# Altium PCB Effect_PCB.PcbDoc
Units mm, origin at the board's own origin, x right, y up, seen from the top; angles counter-clockwise.
Board outline 76.5 x 53.5 mm, 4 copper layers (Top Layer, Middle Layer 1, Middle Layer 2, Bottom Layer), stack 1.641 mm thick; 86 components, 53 nets, 326 pads, 231 vias.
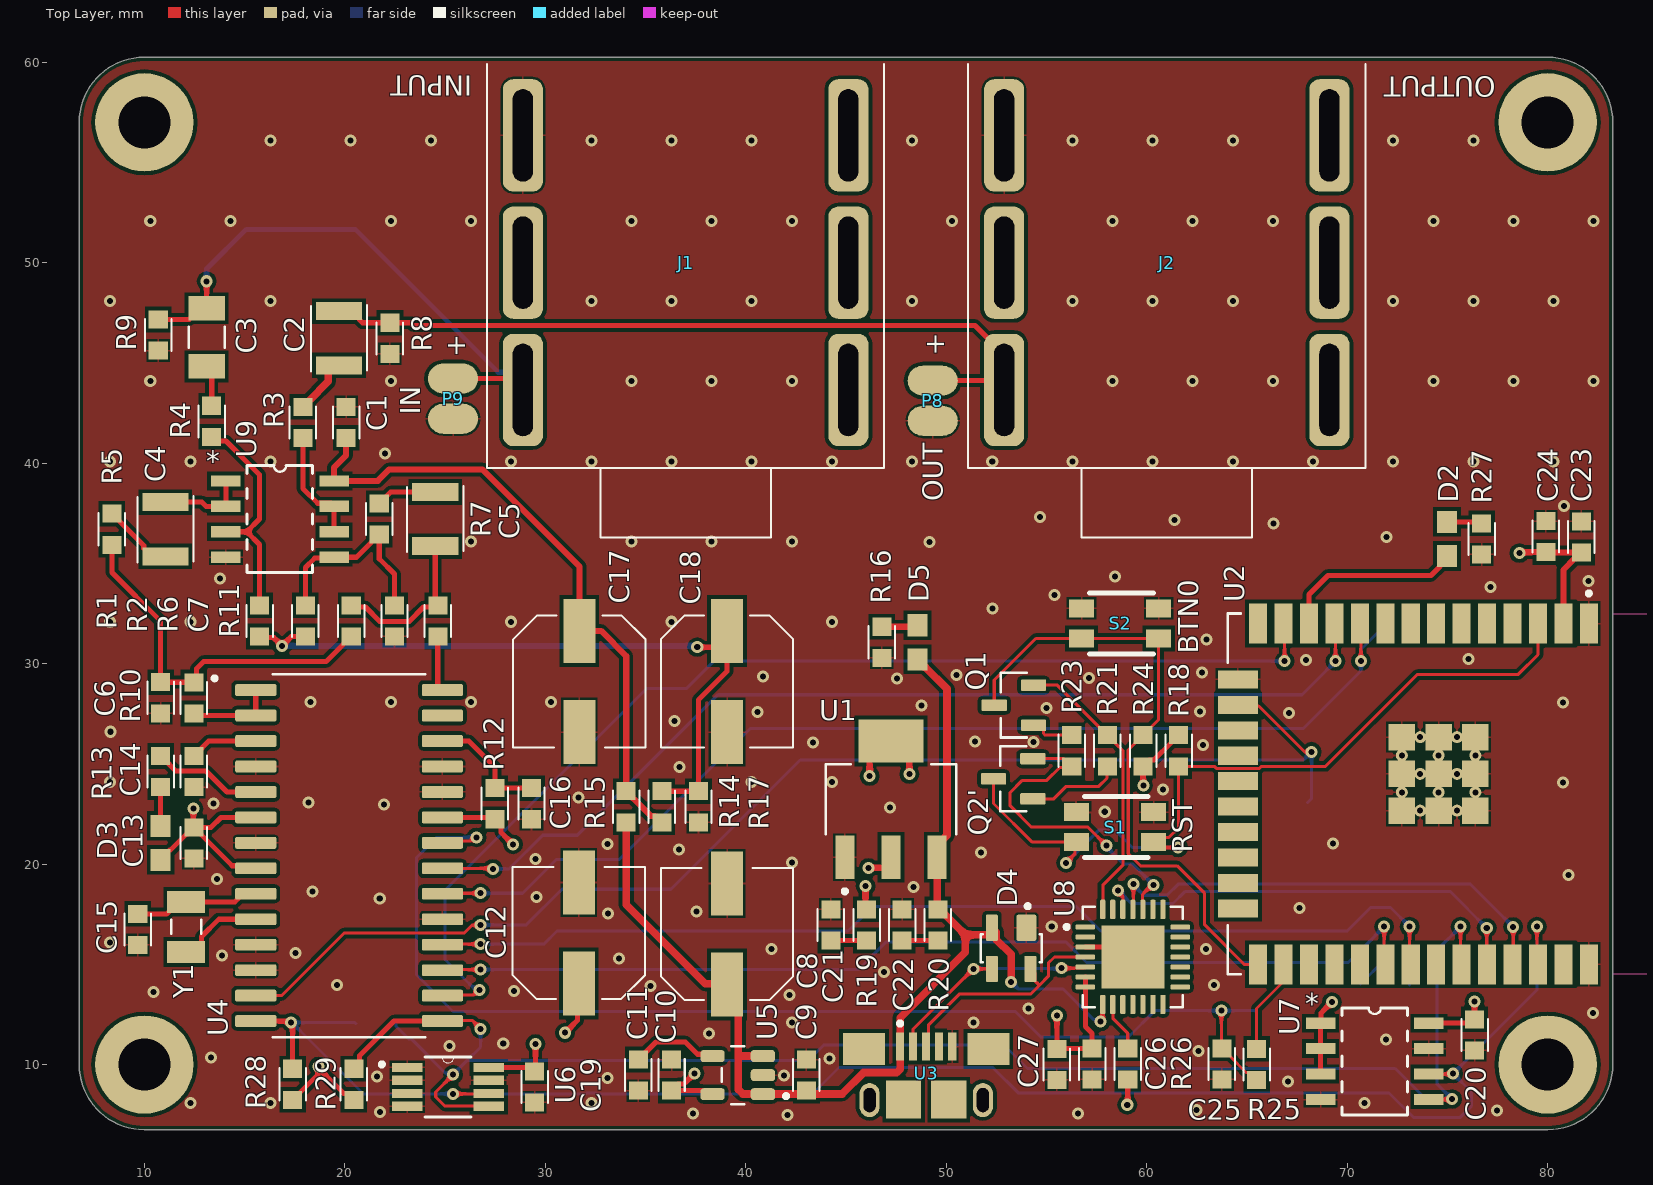
[diagram p0: Top Layer view]
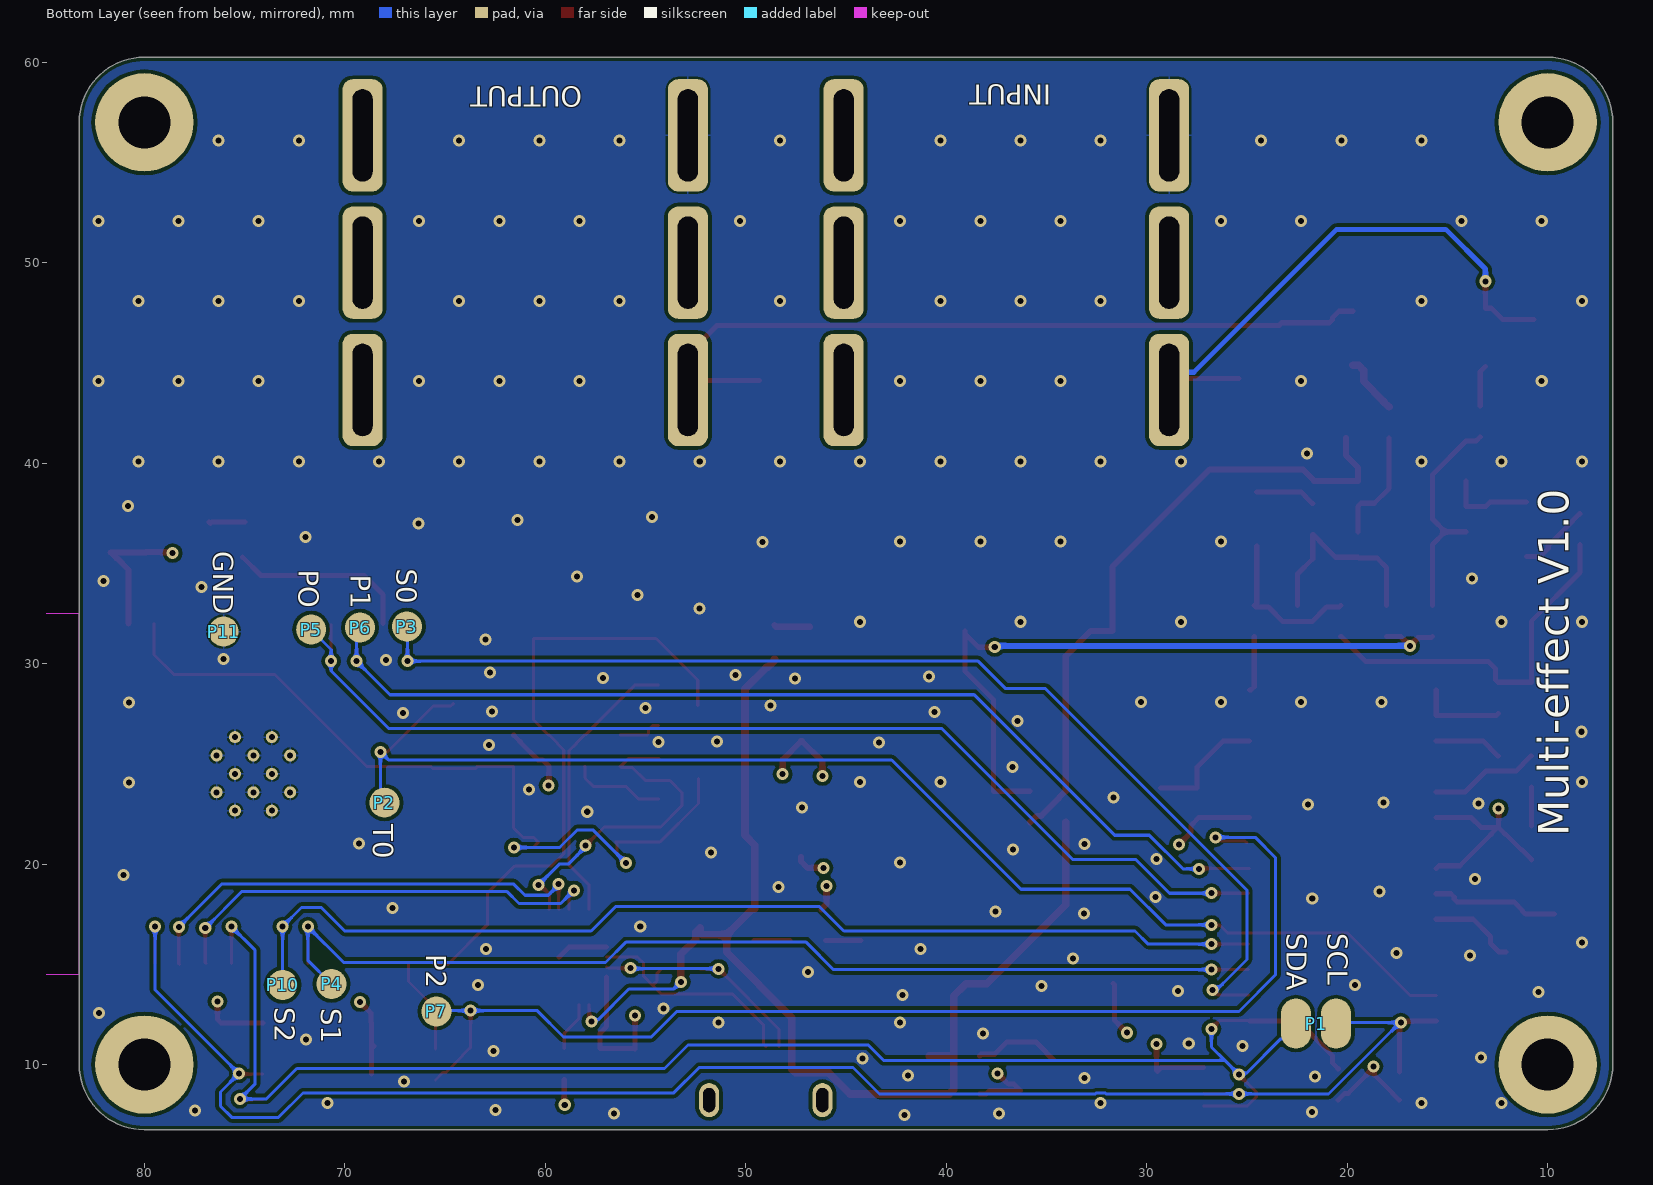
[diagram p1: Bottom Layer view, seen from below]
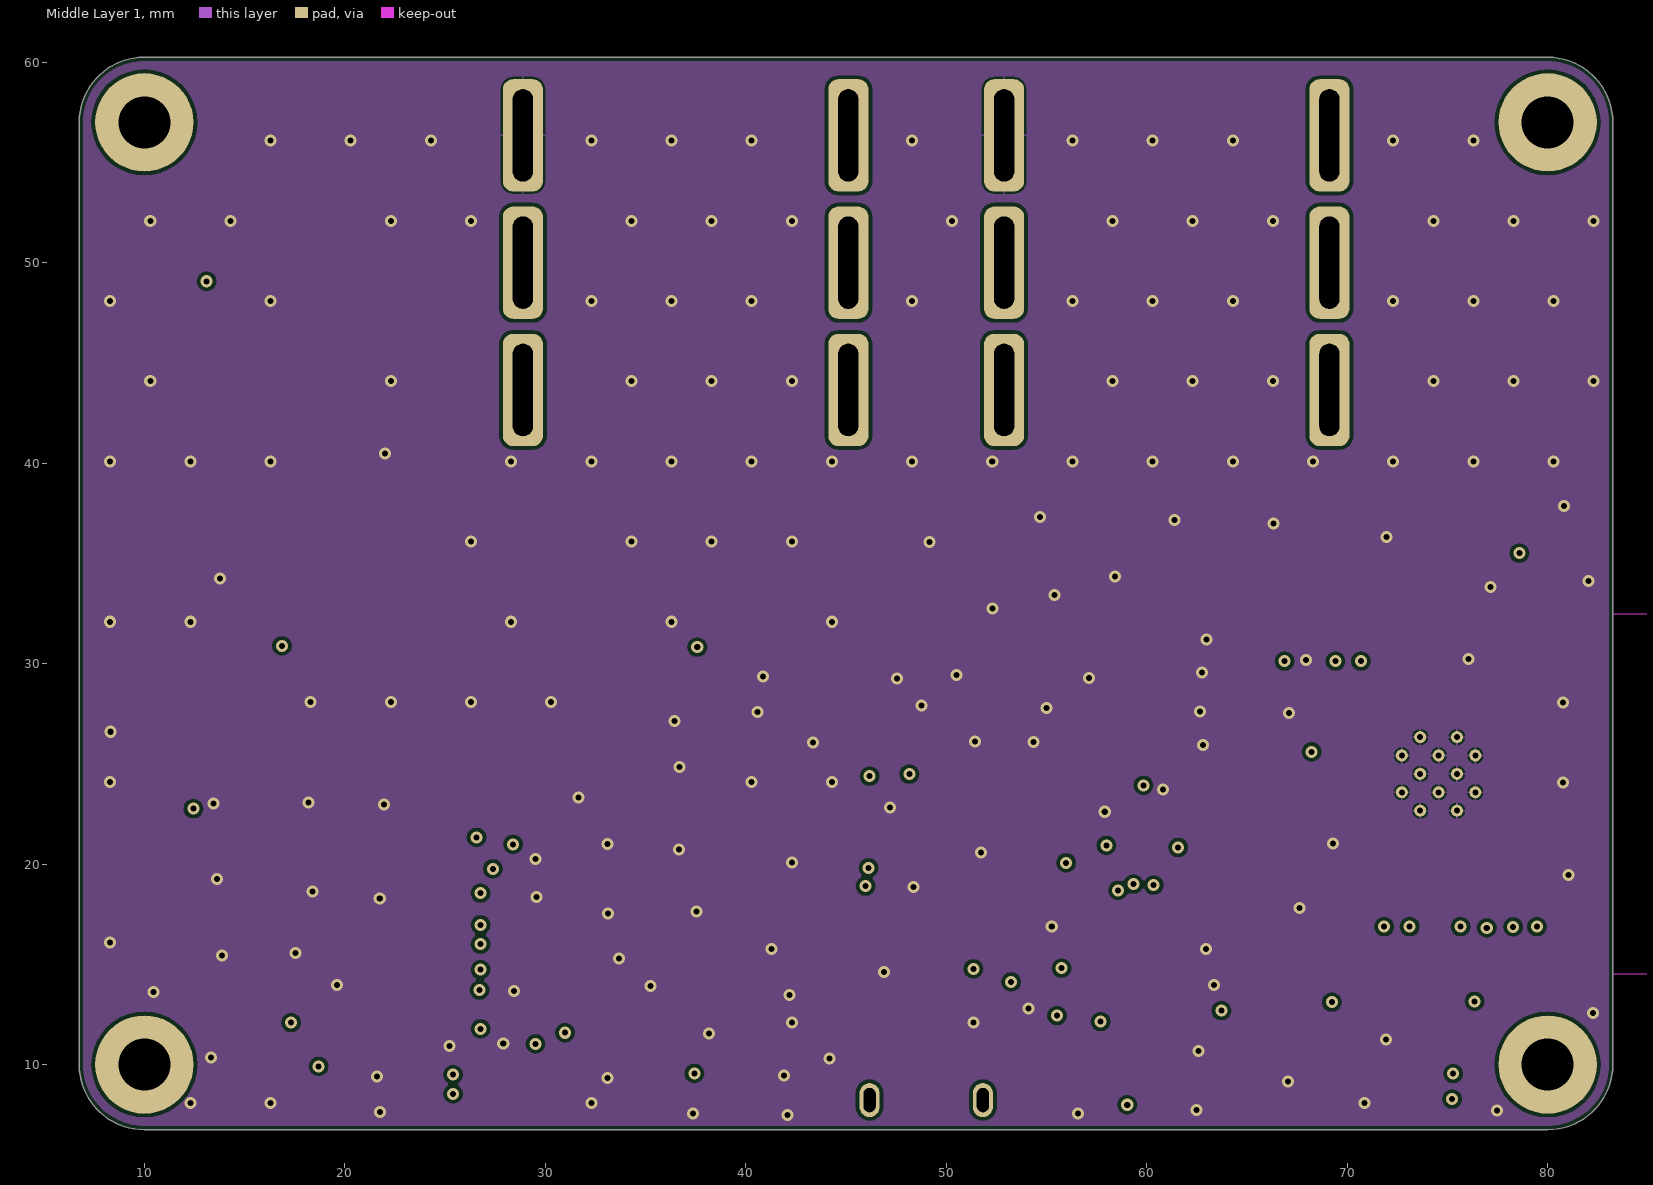
[diagram p2: Middle Layer 1]
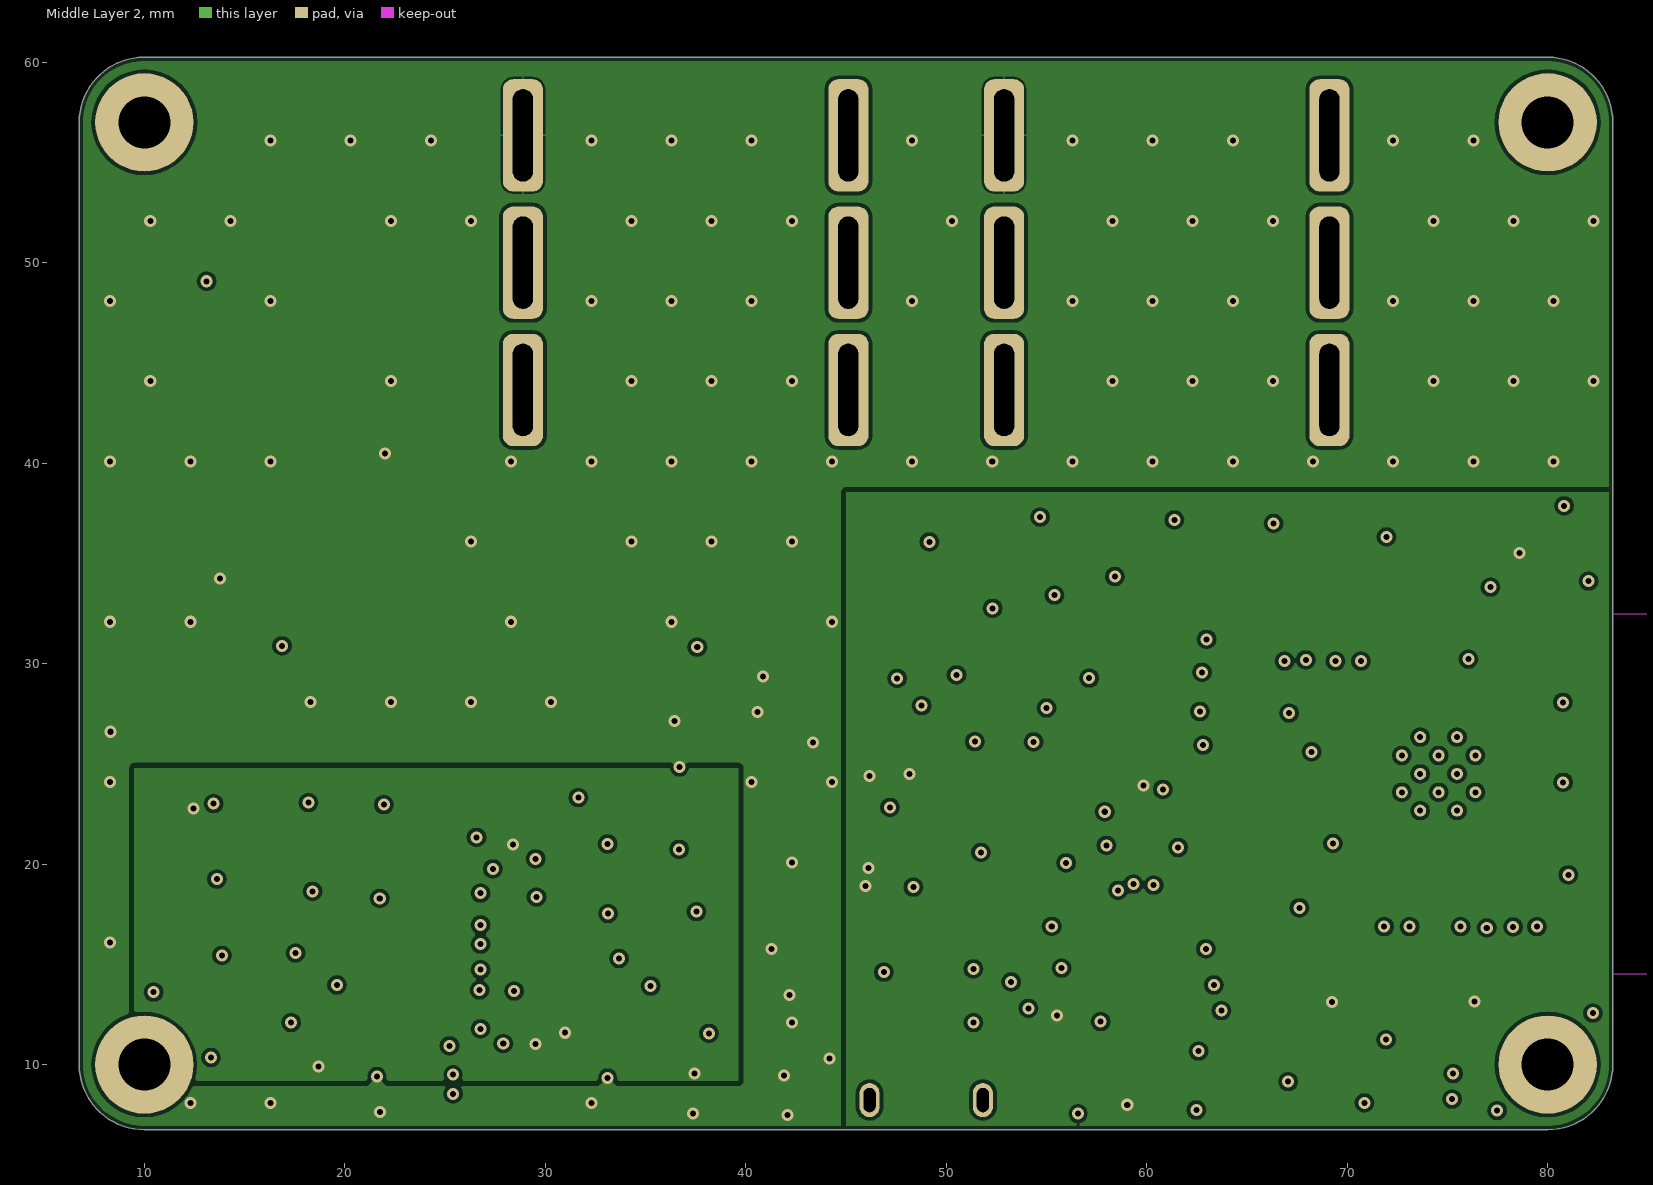
[diagram p3: Middle Layer 2]
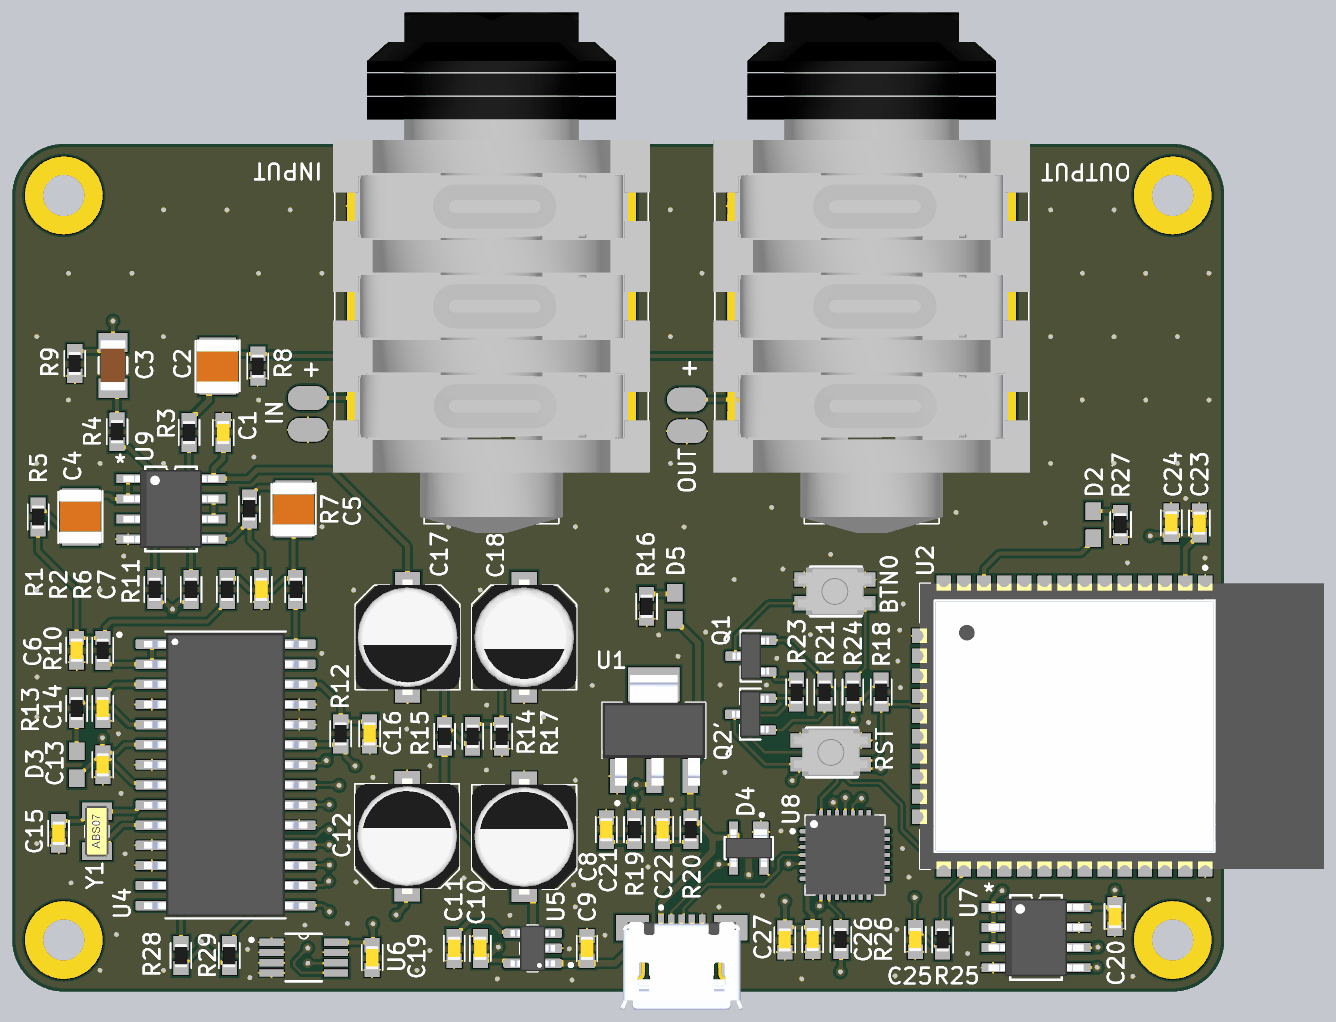
[diagram p4: 3D render of the assembled board from above, using the file's embedded part models]

## Layer stack, top to bottom
Top Solder: solder mask 0.0102, Solder Resist, Dk 3.5
Top Layer: signal copper 0.0356
Dielectric 2: dielectric 0.1702, FR-4, Dk 4.5
Middle Layer 1: signal copper 0.0178
Dielectric 1: dielectric 1.1938, FR-4, Dk 4.8
Middle Layer 2: signal copper 0.0178
Dielectric 3: dielectric 0.1702, FR-4, Dk 4.5
Bottom Layer: signal copper 0.0356
Bottom Solder: solder mask 0.0102, Solder Resist, Dk 3.5

## Board outline
6.75,10 6.75,57 cw(c10,57) 10,60.25 80,60.25 cw(c80,57) 83.25,57 83.25,10 cw(c80,10) 80,6.75 10,6.75 cw(c10,10)

## Design rules (kind name [scope] priority, off if disabled: settings)
BoardOutlineClearance [All] p1: gap=0.2 ignorepadtopadclearanceinfootprint=FALSE
Clearance [All] p1: gap=0.102 ignorepadtopadclearanceinfootprint=FALSE except(0.127: Arc-Via Track-Via SMDPad-Via THPad-Via Via-Via Via-Fill Via-Region Via-Text; 0.178: Arc-Poly Track-Poly SMDPad-Poly THPad-Poly Via-Poly Fill-Poly; 0.25: Arc-Hole Track-Hole SMDPad-Hole THPad-Hole Via-Hole Fill-Hole Poly-Hole Region-Hole Text-Hole; 0.254: Poly-Poly)
ComponentClearance [All] p1: gap=0.102 collisioncheckmode=3 verticalgap=0.102 showdistances=TRUE
DiffPairsRouting [All] p1: maxlimit=0.102 minlimit=0.102 mostfreqgap=0.102 toplayer_minwidth=0.102 toplayer_maxwidth=1816.048 toplayer_prefwidth=0.102 midlayer1_minwidth=0.102 midlayer1_maxwidth=1816.048 midlayer1_prefwidth=0.102 midlayer2_minwidth=0.102 midlayer2_maxwidth=1816.048 midlayer2_prefwidth=0.102 bottomlayer_minwidth=0.102 bottomlayer_maxwidth=1816.048 bottomlayer_prefwidth=0.102 maxuncoupledlength=12.7
Height [All] p1: minheight=0 maxheight=1816.048 prefheight=12.7
HoleSize [All] p1: absolutevalues=TRUE maxlimit=6.3 minlimit=0.2 maxpercent=80.000 minpercent=20.000
HoleToHoleClearance [All] p1: gap=0.25 allowstackedmicrovias=FALSE
MinimumAnnularRing [All] p1: minimumring=0.076
MinimumSolderMaskSliver [All] p1: minsoldermaskwidth=0
PlaneClearance [All] p1: clearance=0.152
PlaneConnect PlaneConnectPowerPads [InPadClass('PowerPads')] p1: planeconnectstyle=Direct reliefexpansion=0.508 reliefentries=4 reliefconductorwidth=0.254 reliefairgap=0.254
PlaneConnect [All] p2: pad.planeconnectstyle=Relief pad.reliefexpansion=0.3 pad.reliefentries=4 pad.reliefconductorwidth=0.102 pad.reliefairgap=0.102 via.planeconnectstyle=Direct via.reliefexpansion=0.3 via.reliefentries=4 via.reliefconductorwidth=0.127 via.reliefairgap=0.127
PolygonConnect PolygonConnectPowerPads [All vs (InPadClass('PowerPads'))] p1: connectstyle=Direct reliefconductorwidth=0.254 reliefentries=4 polygonreliefangle="90 Angle" airgapwidth=0.254
PolygonConnect [All] p2: thpad.connectstyle=Relief thpad.reliefconductorwidth=0.102 thpad.reliefentries=4 thpad.polygonreliefangle="90 Angle" thpad.airgapwidth=0.102 smdpad.connectstyle=Relief smdpad.reliefconductorwidth=0.102 smdpad.reliefentries=4 smdpad.polygonreliefangle="90 Angle" smdpad.airgapwidth=0.102 via.connectstyle=Direct via.reliefconductorwidth=0.127 via.reliefentries=4 via.polygonreliefangle="90 Angle" via.airgapwidth=0.127
RoutingVias [All] p1: holewidth=0.2 width=0.45 viastyle="Through Hole" minholewidth=0.2 minwidth=0.45 maxholewidth=6.3 maxwidth=6.55
SilkToSilkClearance [All] p1: silktosilkclearance=0
SilkToSolderMaskClearance [IsPad] p1: minsilkscreentomaskgap=0.102 clearancetoexposedcopper=TRUE
SolderMaskExpansion [All] p1: expansion=0.075 istentingtop=FALSE
Width [All] p1: maxlimit=1816.048 minlimit=0.102 preferedwidth=0.102
20 further rules are at their usual default settings.

## Classes and differential pairs
component class FV-1: C1 C2 C3 C4 C5 C6 C7 C8 C9 C10 C11 C12 C13 C14 C15 C16 C17 C18 C19 C20 D3 D5 J1 J2 P1 P8 P9 R1 R2 R3 R4 R5 R6 R7 R8 R9 R10 R11 R12 R13 R14 R15 R16 R17 R28 R29 U U4 U5 U6 U7 U9 Y1
component class ESP32: C21 C22 C23 C24 C25 C26 C27 D2 D4 P2 P3 P4 P5 P6 P7 P10 P11 Q1 Q2' R18 R19 R20 R21 R23 R24 R25 R26 R27 S1 S2 U1 U2 U3 U8

## Components (designator, comment, footprint, x,y, rotation, side; value= is the part's Value field where it differs from the comment)
C1 "0.1uF" CHIP_0603 20.066,42.037 r90 top
C2 "1u" CHIP_1210 19.71,46.228 r270 top
C3 "100n" CAPC3216X180N 13.106,46.279 r90 top
C4 "1u" CHIP_1210 11.049,36.703 r90 top
C5 "1u" CHIP_1210 24.511,37.211 r270 top
C6 "2n2" CHIP_0603 10.815,28.298 r270 top
C7 "2n2" CHIP_0603 22.479,32.131 r270 top
C8 "100u" UCD1E101MCL1GS 39.065,16.51 r90 top
C9 "1u" CHIP_0603 43.028,9.474 r90 top
C10 "1u" CHIP_0603 36.297,9.474 r90 top
C11 "DNP" CHIP_0603 34.646,9.474 r90 top
C12 "100u" UCD1E101MCL1GS 31.674,16.561 r90 top
C13 "1u" CHIP_0603 12.466,21.059 r270 top
C14 "1u" CHIP_0603 12.466,24.615 r270 top
C15 "15p" CHIP_0603 9.672,16.741 r270 top
C16 "1u" CHIP_0603 29.312,23.012 r270 top
C17 "100u" UCD1E101MCL1GS 31.699,29.108 r270 top
C18 "47u" EEE1EA470WAP 39.065,29.108 r270 top
C19 "0.1uF" CHIP_0603 29.464,8.89 r270 top
C20 "0.1uF" CHIP_0603 76.352,11.481 r270 top
C21 "22uF" CHIP_0603 44.247,16.967 r90 top
C22 "22uF" CHIP_0603 47.803,16.967 r90 top
C23 "0.1uF" CHIP_0603 81.686,36.322 r90 top
C24 "22uF" CHIP_0603 79.908,36.335 r90 top
C25 "22uF" CHIP_0603 63.754,10.033 r270 top
C26 "0.1uF" CHIP_0603 57.277,10.033 r270 top
C27 "4.7Uf" CHIP_0603 55.519,10.01 r270 top
D2 "Blue LED" "0603 LED Generic" 74.981,36.22 r270 top
D3 "Clip LED" "0603 LED Generic" 10.815,21.059 r270 top
D4 "SP0503BAHTG" SP0503BAHTG 53.238,15.799 r180 top
D5 "Red LED" "0603 LED Generic" 48.565,31.064 r270 top
J1 "Input" ACJS-IHS 37,50 r90 top
J2 "Output" ACJS-IHS 61,50 r90 top
P1 "I2C Test Point" "2 Test Points" 21.539,12.04 r270 bottom
P2 "Test Point" "1 Solder Pad" 68.021,23.063 r180 bottom
P3 "Test Point" "1 Solder Pad" 66.904,31.852 r180 bottom
P4 "Test Point" "1 Solder Pad" 70.663,14.021 r180 bottom
P5 "Test Point" "1 Solder Pad" 71.679,31.699 r180 bottom
P6 "Test Point" "1 Solder Pad" 69.24,31.801 r180 bottom
P7 "Test Point" "1 Solder Pad" 65.43,12.649 r180 bottom
P8 "Double Test Point" "2 Test Points" 49.327,43.129 r0 top
P9 "Double Test Point" "2 Test Points" 25.4,43.231 r0 top
P10 "Test Point" "1 Solder Pad" 73.101,13.97 r90 bottom
P11 "Test Point" "1 Solder Pad" 76.048,31.598 r180 bottom
Q1 "SS8050-G" SS8050-G 53.376,27.924 r270 top
Q2' "SS8050-G" SS8050-G 53.34,24.257 r270 top
R1 "1M" CHIP_R_0603 15.748,32.131 r90 top
R2 "100K" CHIP_R_0603 18.034,32.131 r90 top
R3 "100R" CHIP_R_0603 17.907,42.037 r90 top
R4 "1K" CHIP_R_0603 13.36,42.088 r270 top
R5 "1K" CHIP_R_0603 8.382,36.703 r270 top
R6 "DNP" CHIP_R_0603 20.32,32.131 r90 top
R7 "1K" CHIP_R_0603 21.717,37.211 r270 top
R8 "100K" CHIP_R_0603 22.25,46.228 r270 top
R9 "1M" CHIP_R_0603 10.693,46.393 r270 top
R10 "0R" CHIP_R_0603 12.466,28.285 r270 top
R11 "0R" CHIP_R_0603 24.638,32.131 r90 top
R12 "100R" CHIP_R_0603 27.483,23.012 r270 top
R13 "100R" CHIP_R_0603 10.815,24.615 r90 top
R14 "47R" CHIP_R_0603 34.036,22.86 r270 top
R15 "10K" CHIP_R_0603 35.814,22.86 r270 top
R16 "1K" CHIP_R_0603 46.787,31.064 r90 top
R17 "10K" CHIP_R_0603 37.643,22.86 r270 top
R18 "10K" CHIP_R_0603 61.595,25.654 r270 top
R19 "1R" CHIP_R_0603 46.025,16.967 r270 top
R20 "1R" CHIP_R_0603 49.581,16.967 r270 top
R21 "10K" CHIP_R_0603 58.039,25.654 r90 top
R23 "10K" CHIP_R_0603 56.261,25.654 r270 top
R24 "10K" CHIP_R_0603 59.817,25.654 r90 top
R25 "2K" CHIP_R_0603 65.481,10.008 r270 top
R26 "2K" CHIP_R_0603 59.055,10.033 r270 top
R27 "1K" CHIP_R_0603 76.708,36.22 r270 top
R28 "DNP" CHIP_R_0603 17.399,9.017 r90 top
R29 "DNP" CHIP_R_0603 20.447,9.017 r90 top
S1 "TS-1185EC-C-D-B" TS-1185EC-C-D-B 58.42,21.844 r180 top
S2 "TS-1185EC-C-D-B" TS-1185EC-C-D-B 58.674,32.004 r180 top
U1 "LMS8117AMP-3.3/NOPB" SOT230P700X180-4N 47.244,23.241 r90 top
U2 "ESP32-WROOM-32E_(16MB)" MODULE_ESP32-WROOM-32E 76.8,23.5 r270 top
U3 "Micro_USB" U254-051T-4BH83-F1S 49,10.9 r0 top
U4 "SPN1001" SOIC-28 20.213,20.424 r0 top
U5 "LD39015M33R" SOT-23 39.599,9.474 r180 top
U6 "24LC32AT-I/MS" 24LC32AT-I/MS 25.146,8.89 r0 top
U7 "24LC512-I/SN" 24LC512-I/SN 71.374,10.16 r0 top
U8 "CP2102-GM" QFN50P500X500X100-29N 59.309,15.367 r0 top
U9 "TL072IDT" TL072BIDT 16.764,37.211 r0 top
Y1 "32.768kHz" XTAL_ABS07-32.768KHZ-T 12.085,16.868 r90 top

## Footprints (in the part's own frame and the unit in brackets; to place one, negate y for a bottom-side part, rotate by r counter-clockwise, add the part's x,y. Pads: shape width x height; smd on the part's side, far side on the other; paste and mask are expansions set on the pad)
"1 Solder Pad" [mm]
  round 1.5 smd: 1(0,0)
"2 Test Points" [mm]
  oval 2.5x1.5 smd: 1(0,0.984) 2(0,-1.016)
24LC32AT-I/MS [mil]
  rect 60x18 smd: 1(-80,38) 2(-80,13) 3(-80,-13) 4(-80,-38) 5(80,-38) 6(80,-13) 7(80,13) 8(80,38)
  silkscreen extent -134,-59 45,59, body extent -96,-59 96,59, height 45
24LC512-I/SN [mil]
  rect 58x22 smd: 1(-106.3,75) 2(-106.3,25) 3(-106.3,-25) 4(-106.3,-75) 5(106.3,-75) 6(106.3,-25) 7(106.3,25) 8(106.3,75)
  silkscreen extent -64,-105 64,105, body extent -118,-96 118,96, height 69
"0603 LED Generic" [mm]
  rect 1.1x1 smd: 1(-0.85,0) 2(0.85,0)
  body extent -0.8,-0.4 0.8,0.4, height 0.4
ACJS-IHS [mm]
  rrect50% 5.6x2 hole 1 slot 4.6 at 0 deg: R(0,8.115) RN(0,-8.115) S(6.35,8.115) SN(6.35,-8.115) T(-6.35,8.115) TN(-6.35,-8.115)
  silkscreen extent -13.72,-9.91 9.91,9.91, body extent -14.3,-10 18.55,10, height 16.05
CAPC3216X180N [mm]
  rect 1.21x1.82 smd: 1(-1.45,0) 2(1.45,0)
  silkscreen extent -0.52,-0.9 0.52,0.9, body extent -1.6,-0.8 1.6,0.8, height 1.8
CHIP_0603 [mm] "Chip Capacitor, 2-Leads, Body 1.60x0.80mm, IPC Medium Density"
  rect 0.9x0.95 smd: 1(-0.775,0) 2(0.775,0)
  silkscreen extent -0.8,-0.66 0.8,0.66, body extent -0.75,-0.4 0.75,0.4, height 0.65
CHIP_1210 [mm] "Chip Capacitor, 2-Leads, Body 3.20x2.50mm, IPC Medium Density"
  rect 0.9x2.3 smd: 1(-1.35,0) 2(1.35,0)
  silkscreen extent -1.65,-1.4 1.65,1.4, body extent -1.68,-1.35 1.73,1.35, height 1
CHIP_R_0603 [mm] "Chip Resistor, 2-Leads, Body 1.60x0.80mm, IPC Medium Density"
  rect 0.9x0.95 smd: 1(-0.775,0) 2(0.775,0)
  silkscreen extent -0.8,-0.66 0.8,0.66, body extent -0.75,-0.4 0.75,0.4, height 0.63
EEE1EA470WAP [mm] "Aluminum Electrolytic Capacitor, Body 6.60x6.60x5.40mm, IPC Low Density"
  rect 3.2x1.6 smd: +(-2.521,0) -(2.521,0)
  silkscreen extent -3.3,-3.3 3.3,3.3, body extent -3.65,-3.3 3.65,3.3, height 5.8
MODULE_ESP32-WROOM-32E [mm]
  rect 2x0.9 smd: 1(-8.5,5.26) 2(-8.5,3.99) 3(-8.5,2.72) 4(-8.5,1.45) 5(-8.5,0.18) 6(-8.5,-1.09) 7(-8.5,-2.36) 8(-8.5,-3.63) 9(-8.5,-4.9) 10(-8.5,-6.17) 11(-8.5,-7.44) 12(-8.5,-8.71) 13(-8.5,-9.98) 14(-8.5,-11.25) 25(8.5,-11.25) 26(8.5,-9.98) 27(8.5,-8.71) 28(8.5,-7.44) 29(8.5,-6.17) 30(8.5,-4.9) 31(8.5,-3.63) 32(8.5,-2.36) 33(8.5,-1.09) 34(8.5,0.18) 35(8.5,1.45) 36(8.5,2.72) 37(8.5,3.99) 38(8.5,5.26)
  rect 0.9x2 smd: 15(-5.715,-12.25) 16(-4.445,-12.25) 17(-3.175,-12.25) 18(-1.905,-12.25) 19(-0.635,-12.25) 20(0.635,-12.25) 21(1.905,-12.25) 22(3.175,-12.25) 23(4.445,-12.25) 24(5.715,-12.25)
  rect 1.33x1.33 smd: 39(-2.835,-0.405) 39(-2.835,-2.24) 39(-2.835,-4.075) 39(-1,-0.405) 39(-1,-2.24) 39(-1,-4.075) 39(0.835,-0.405) 39(0.835,-2.24) 39(0.835,-4.075)
  round 0.6 hole 0.3: 39(-2.835,-1.322) 39(-2.835,-3.157) 39(-1.917,-0.405) 39(-1.917,-2.24) 39(-1.917,-4.075) 39(-1,-1.322) 39(-1,-3.157) 39(-0.082,-0.405) 39(-0.082,-2.24) 39(-0.082,-4.075) 39(0.835,-1.322) 39(0.835,-3.157)
  Keep-Out Layer region: 9,6.45 -9,6.45 -9,12.75 9,12.75
  Keep-Out Layer region: 9,6.45 -9,6.45 -9,12.75 9,12.75
  silkscreen extent -10.1,-12.75 9,5.35, body extent -9,-12.75 9,12.75, height 3.2
QFN50P500X500X100-29N [mm]
  rrect50% 0.97x0.26 smd: 1(-2.37,1.5) 2(-2.37,1) 3(-2.37,0.5) 4(-2.37,0) 5(-2.37,-0.5) 6(-2.37,-1) 7(-2.37,-1.5) 15(2.37,-1.5) 16(2.37,-1) 17(2.37,-0.5) 18(2.37,0) 19(2.37,0.5) 20(2.37,1) 21(2.37,1.5)
  rrect50% 0.26x0.97 smd: 8(-1.5,-2.37) 9(-1,-2.37) 10(-0.5,-2.37) 11(0,-2.37) 12(0.5,-2.37) 13(1,-2.37) 14(1.5,-2.37) 22(1.5,2.37) 23(1,2.37) 24(0.5,2.37) 25(0,2.37) 26(-0.5,2.37) 27(-1,2.37) 28(-1.5,2.37)
  rect 3.15x3.15 smd: 29(0,0)
  silkscreen extent -3.4,-2.5 2.5,2.5, body extent -2.5,-2.5 2.5,2.5, height 1
SOIC-28 [mm]
  rrect25% 2.05x0.59 smd: 1(-4.655,8.255) 2(-4.655,6.985) 3(-4.655,5.715) 4(-4.655,4.445) 5(-4.655,3.175) 6(-4.655,1.905) 7(-4.655,0.635) 8(-4.655,-0.635) 9(-4.655,-1.905) 10(-4.655,-3.175) 11(-4.655,-4.445) 12(-4.655,-5.715) 13(-4.655,-6.985) 14(-4.655,-8.255) 15(4.655,-8.255) 16(4.655,-6.985) 17(4.655,-5.715) 18(4.655,-4.445) 19(4.655,-3.175) 20(4.655,-1.905) 21(4.655,-0.635) 22(4.655,0.635) 23(4.655,1.905) 24(4.655,3.175) 25(4.655,4.445) 26(4.655,5.715) 27(4.655,6.985) 28(4.655,8.255)
  silkscreen extent -6.8,-9.05 3.8,9.05, body extent -5.16,-8.95 5.16,8.95, height 2.65
SOT230P700X180-4N [mm]
  rect 2.15x0.95 smd: 1(-2.9,2.3) 2(-2.9,0) 3(-2.9,-2.3)
  rect 2.15x3.25 smd: 4(2.9,0)
  silkscreen extent -4.7,-3.25 1.75,3.25, body extent -3.5,-3.25 3.5,3.25, height 1.8
SOT-23 [mm]
  rrect50% 1.21x0.59 smd: 1(-1.255,0.95) 2(-1.255,0) 3(-1.255,-0.95) 4(1.255,-0.95) 5(1.255,0.95)
  silkscreen extent -2.51,-1.45 0.8,1.45, body extent -1.4,-1.45 1.4,1.45, height 1.45
SP0503BAHTG [mm]
  rrect15% 0.99x1.3 smd: 1(-0.76,-1.025)
  rrect15% 0.59x1.3 smd: 2(0.96,-1.025) 3(0.96,1.025) 4(-0.96,1.025)
  silkscreen extent -1.52,-2.2 1.52,0.7, body extent -1.46,-1.18 1.46,1.19, height 1.22
SS8050-G [mm]
  rrect25% 0.59x1.26 smd: 1(1,0.98) 2(-1,0.98) 3(0,-0.98)
  silkscreen extent -1.61,-0.65 1.61,0.65, body extent -1.45,-1.15 1.45,1.15, height 1.1
TL072BIDT [mil]
  rect 58x22 smd: 1(-106.3,75) 2(-106.3,25) 3(-106.3,-25) 4(-106.3,-75) 5(106.3,-75) 6(106.3,-25) 7(106.3,25) 8(106.3,75)
  silkscreen extent -64,-105 64,105, body extent -118,-96 118,96, height 69
TS-1185EC-C-D-B [mm]
  rect 1.25x0.9 smd: 1(-1.925,0.75) 2(1.925,0.75) 3(1.925,-0.75) 4(-1.925,-0.75)
  silkscreen extent -1.65,-1.52 1.52,1.52, body extent -2.33,-1.5 2.33,1.5, height 2
U254-051T-4BH83-F1S [mm]
  rect 0.4x1.4 smd: 1(-1.3,0) 2(-0.65,0) 3(0,0) 4(0.65,0) 5(1.3,0)
  rect 2.1x1.6 smd: S1(-3.1,-0.125) S2(3.1,-0.125)
  rect 1.75x1.9 smd: S3(-1.125,-2.65) S4(1.125,-2.65)
  oval 1x1.7 hole 0.6 slot 1.2 at 90 deg: S5(-2.825,-2.67) S6(2.825,-2.67)
  silkscreen extent -1.4,1.05 -1.2,1.25, body extent -3.9,-5.31 3.9,0.24, height 2.7
UCD1E101MCL1GS [mm] "Aluminum Electrolytic Capacitor, Body 6.60x6.60x5.40mm, IPC Low Density"
  rect 3.2x1.6 smd: +(-2.521,0) -(2.521,0)
  silkscreen extent -3.3,-3.3 3.3,3.3, body extent -3.65,-3.3 3.65,3.3, height 7.7
XTAL_ABS07-32.768KHZ-T [mm]
  rect 1.1x1.9 smd: 1(-1.25,0) 2(1.25,0)
  silkscreen extent -0.35,-0.75 0.35,0.75, body extent -1.6,-0.75 1.6,0.75, height 0.89

## Part data
C1 C9 C10 C11 C13 C14 C15 C16 C19 C20 C21 C22 C23 C24 C25 C26 C27: library part "0603 Ceramic Capacitor", "Generic 0603 Ceramic Capacitor", Package="1005 Yageo", DigiKey-Purchase-URL=https://snapeda.com/shop?store=DigiKey&id=940461, MF=Yageo, Mouser-Purchase-URL=https://snapeda.com/shop?store=Mouser&id=940461, MP=AC0402FR-071ML, SnapEDA_Link=https://www.snapeda.com/parts/AC0402FR-071ML/Yageo/view-part/940461/?ref=snap
C2 C4 C5: library part ECP-U1C105MA5, "CAP FILM 1UF 16V 20%", Capacitance=1uF, Case Code (Imperial)=1210, Case Code (Metric)=3225, Dielectric=PPS, Insulation Resistance=300MR, Manufacturer=Panasonic, Max Operating Temperature=85°C, Min Operating Temperature=-40°C, Package Quantity=1, Supplier Part Number 1=9694315, Tolerance=20%, Voltage=16V, Case/Package=1210, Category="Film Capacitors", ComponentLink1Description=https://datasheet.ciiva.com/24023/abd0000ce12-181823-24023616.pdf?src-supplier=Mouser, ComponentLink1URL=https://datasheet.ciiva.com/24023/abd0000ce12-181823-24023616.pdf?src-supplier=Mouser, ComponentLink2Description=https://datasheet.ciiva.com/34303/1983192-34303533.pdf?src-supplier=Jameco, ComponentLink2URL=https://datasheet.ciiva.com/34303/1983192-34303533.pdf?src-supplier=Jameco, ComponentLink3Description=https://datasheet.ciiva.com/11790/0900766b80f2ea72-11790686.pdf?src-supplier=RSComponents, ComponentLink3URL=https://datasheet.ciiva.com/11790/0900766b80f2ea72-11790686.pdf?src-supplier=RSComponents, ComponentLink4Description=https://datasheet.ciiva.com/2992/abd0000ce12-2992994.pdf?src-supplier=Avnet, ComponentLink4URL=https://datasheet.ciiva.com/2992/abd0000ce12-2992994.pdf?src-supplier=Avnet, ComponentLink5Description=https://datasheet.ciiva.com/2992/abd0000ce12-2992995.pdf?src-supplier=Avnet, ComponentLink5URL=https://datasheet.ciiva.com/2992/abd0000ce12-2992995.pdf?src-supplier=Avnet, ComponentLink6Description=https://datasheet.ciiva.com/46399/31740-46399788.pdf?src-supplier=Element14, ComponentLink6URL=https://datasheet.ciiva.com/46399/31740-46399788.pdf?src-supplier=Element14, ComponentLink7Description=https://datasheet.ciiva.com/16433/abd0000ce12-16433502.pdf?src-supplier=Future+Electronics, ComponentLink7URL=https://datasheet.ciiva.com/16433/abd0000ce12-16433502.pdf?src-supplier=Future+Electronics, ComponentLink8Description=https://datasheet.ciiva.com/5710/31740-5710134.pdf?src-supplier=Farnell, ComponentLink8URL=https://datasheet.ciiva.com/5710/31740-5710134.pdf?src-supplier=Farnell, ComponentLink9Description=https://datasheet.ciiva.com/30120/abd0000ce12-30120298.pdf?src-supplier=Onlinecomponents.com, ComponentLink9URL=https://datasheet.ciiva.com/30120/abd0000ce12-30120298.pdf?src-supplier=Onlinecomponents.com, ComponentLink10Description=https://datasheet.ciiva.com/46399/31740-46399787.pdf?src-supplier=Element14, ComponentLink10URL=https://datasheet.ciiva.com/46399/31740-46399787.pdf?src-supplier=Element14, ComponentLink11Description=https://datasheet.ciiva.com/15164/getdatasheetpartid-292104-15164029.pdf?src-supplier=Verical, ComponentLink11URL=https://datasheet.ciiva.com/15164/getdatasheetpartid-292104-15164029.pdf?src-supplier=Verical, Contact Plating=Copper,Tin,Silver, Depth=2.5mm, Dissipation Factor=1.5%, Height=1.4mm, Height - Seated (Max)=0.063inch, Lead Free="Lead Free", Length=3.2mm, Manufacturer Part Number=ECP-U1C105MA5, Mount="Surface Mount", Number of Pins=2, Packaging="Tape and Reel", Pricing="5=0.65900, 50=0.39900, 250=0.33300, 500=0.27300, 1000=0.26400 (EUR)", Radiation Hardening=No, REACH SVHC="No SVHC", RoHS=Yes, Stock=7744, Supplier 1=Farnell, Termination=SMD/SMT, Voltage Rating=16V, Voltage Rating (DC)=16V, Width=2.5mm
C3: library part GRM31C5C1H104JA01L, "50V 100nF C0G ±5% 1206 Multilayer Ceramic Capacitors"
C6 C7: library part GRM1885C1H222JA01D, "2200PF 50V C0G/NP0 0603"
C8 C12 C17: library part UCD1E101MCL1GS, "CAP ALUM 100UF 25V SMD", ComponentLink1Description=http://www.farnell.com/datasheets/2151198.pdf?src-supplier=Element14, ComponentLink1URL=http://www.farnell.com/datasheets/2151198.pdf?src-supplier=Element14
C18: library part EEE1EA470WAP, "CAP ALUM 47UF 25V SMD", ComponentLink1Description=http://www.farnell.com/datasheets/2151198.pdf?src-supplier=Farnell, ComponentLink1URL=http://www.farnell.com/datasheets/2151198.pdf?src-supplier=Farnell, ComponentLink2Description=http://www.farnell.com/datasheets/2151198.pdf?src-supplier=Element14, ComponentLink2URL=http://www.farnell.com/datasheets/2151198.pdf?src-supplier=Element14
D2 D3 D5: library part "0603 Generic LED", "0603 Generic LED"
D4: "8.5V Clamp Ipp Tvs Diode Surface Mount SOT-143-4", Package="SOT-143 Littelfuse", Digi-Key_Part_Number=F2715CT-ND, Digi-Key_Purchase_URL=https://www.digikey.com/product-detail/en/littelfuse-inc/SP0503BAHTG/F2715CT-ND/1154322?utm_source=snapeda&utm_medium=aggregator&utm_campaign=symbol, MF="Littelfuse Inc.", MP=SP0503BAHTG, SnapEDA_Link=https://www.snapeda.com/parts/SP0503BAHTG/Littelfuse%20Inc./view-part/214427/?ref=snap
J1 J2: library part ACJS-IHS, "6.35mm stereo insulated socket jack PCB mounted", Price=0.5
P1: library part "Double Test Point"
P2 P3 P4 P5 P6 P7 P10 P11: library part "Single Test Point"
Q1 Q2': "NPN TRANSISTOR 1.5A 40V SOT-23 R"
R1 R2 R3 R4 R5 R6 R7 R8 R9 R10 R11 R12 R13 R14 R15 R16 R17 R18 R19 R20 R21 R23 R24 R25 R26 R27 R28 R29: library part "0603 Generic Resistor", "Generic 0603 Resistor"
S1 S2: "SMD Tactile Switche - 3mm 2mm 50mA 3.65mm SPST 12V"
U1: "Fixed 3.3V LDO 1A 15V input SOT-223   Cap ESR between 0.5-5R, 10uF minimum", Package="SOT-223-4 Texas Instruments", Availability=Warning, Check_prices=https://www.snapeda.com/parts/LMS8117AMP-3.3/NOPB/Texas%20Instruments/view-part/104396/?ref=eda, MF="Texas Instruments", MP=LMS8117AMP-3.3/NOPB, Price=None, Purchase-URL=https://pricing.snapeda.com/search/part/LMS8117AMP-3.3/NOPB/?ref=eda, SnapEDA_Link=https://www.snapeda.com/parts/LMS8117AMP-3.3/NOPB/Texas%20Instruments/view-part/104396/?ref=snap
U2: "Bluetooth, WiFi 802.11b/g/n, Bluetooth v4.2 +EDR, Class 1, 2 and 3 Transceiver Module 2.4GHz ~ 2.5GHz Integrated, Trace Surface Mount", Package=None, Availability=Unavailable, Check_prices=https://www.snapeda.com/parts/ESP32-WROOM-32E%20(16MB)/Espressif%20Systems/view-part/4792564/?ref=eda, MF="Espressif Systems", MP="ESP32-WROOM-32E (16MB)", Price=None, SnapEDA_Link=https://www.snapeda.com/parts/ESP32-WROOM-32E%20(16MB)/Espressif%20Systems/view-part/4792564/?ref=snap
U3: "XKB Connectivity U254-051T-4BH83-F1S"
U5: "Fixed 3.3V LDO 150mA SOT-23-5 Linear Voltage Regulator"
U6: "32K I2C Serial EEPROM"
U7: "512K I2C Serial EEPROM"
U8: "USB Bridge, USB to UART USB 2.0 UART Interface 28-QFN _5x5_", Package="QFN-28 Silicon Labs", Availability=Unavailable, MF="Silicon Labs", MP=CP2102-GM, Price=None, SnapEDA_Link=https://www.snapeda.com/parts/CP2102-GM/Silicon%20Labs/view-part/135876/?ref=snap
U9: "J-FET Amplifier 2 Circuit 8-SO", Package="SOIC-8 STMicroelectronics", Availability=Unavailable, MF=STMicroelectronics, MP=TL072IDT, Price=None, SnapEDA_Link=https://www.snapeda.com/parts/TL072IDT/STMicroelectronics/view-part/265326/?ref=snap
Y1: library part ABS07-32.768KHZ-T, "32.768kHz Â±20ppm Crystal 12.5pF 70 kOhms 2-SMD, No Lead", Package="SMD-2 Abracon", Availability=Unavailable, MF="Abracon LLC", MP=ABS07-32.768KHZ, Price=None, SnapEDA_Link=https://www.snapeda.com/parts/ABS07-32.768KHZ/Abracon%20LLC/view-part/448682/?ref=snap

## Free pads (board coordinates)
  round 4.9 hole 2.6: 4(10,10) 4(10,57) 4(80,10) 4(80,57)

## Via types
v1: diameter 0.6, hole 0.3, Top Layer to Bottom Layer, tented both sides, 231 vias

## Nets (pads, with @x,y where several pads share a name; then routed paths per layer and width w, separated by ;. In a path a pad name is that pad's centre, name@x,y a point inside that pad or via, vN(x,y) a via of type N, cw(c..) or ccw(c..) an arc to the next point about the centre after c; other vN are vias at no path point)
3V3_A: C10.1 C12.+ C13.1 C19.1 D3.2 R12.2 R28.1 R29.1 U4.6 U4.8 U4.23 U5.5 U6.8 | length 29.5
  Top Layer w0.254: D3.2 10.815,20.259 11.251,20.695 11.297,20.695 12.113,21.511 12.143,21.511 C13.1 ; v1(12.441,22.764) 12.444,22.761 12.444,21.856 C13.1 ; U4.8 15.428,19.919 14.381,19.919 12.814,21.486 12.814,21.511 C13.1@12.491,21.834 ; U4.6 13.82,22.329 13.325,21.834 C13.1@12.491,21.834 ; R28.1 17.424,8.242 17.747,8.565 17.747,8.59 18.651,9.494 18.651,9.863 19.949,8.565 20.124,8.565 R29.1 ; U4.23 27.391,22.329 R12.2 27.789,21.931 27.789,21.588 v1@28.397,20.98 ; U6.8 29.274,9.855 C19.1 29.51,9.711 v1(29.51,11.029) ; v1(30.983,11.588) 31.603,12.207 31.613,12.207 31.613,13.978 C12.+ ; v1(37.435,9.556) 36.901,9.022 36.62,9.022 C10.1 37.848,8.699 38.023,8.524 U5.5 ; C13.1 C13.1@12.491,21.834
  other v1: 18.694,9.906 28.392,20.986
3V3_D: C20.1 C23.1 C24.1 C26.1 C27.1 R18.1 R19.1 R24.1 R26.2 U1.2 U1.4 U2.2 U7.1 U7.2 U7.3 U7.8 U8.6 U8.7 | length 33.1
  Top Layer w0.254: v1@55.519,12.446 C27.1 55.542,10.808 C26.1 57.277,11.557 56.939,11.895 U8.7 U8.6 ; v1@59.055,8.183 R26.2 ; v1(59.837,23.932) 59.817,23.952 R24.1 60.14,25.202 60.368,25.202 61.247,26.081 61.247,26.106 61.57,26.429 R18.1 ; U7.2@68.547,10.922 U7.2 ; U7.3 U7.2 ; v1(69.235,13.112) 68.7,12.577 68.7,12.091 U7.1 U7.2 ; U7.8 76.162,12.065 C20.1 v1(76.352,13.157)
  Top Layer w0.305: v1(45.974,18.898) 45.974,17.996 R19.1@46.228,17.742 ; v1(46.126,19.812) 46.921,19.812 47.244,20.135 U1.2 ; v1(46.177,24.384) 46.177,25.122 47.196,26.141 47.231,26.141 48.158,25.213 v1(48.158,24.486) ; v1(59.03,7.995) 59.03,8.015 59.126,8.112 v1@59.055,8.183 ; v1(78.588,35.509) 78.638,35.56 C24.1 79.921,35.547 C23.1 81.389,35.249 81.361,35.249 80.79,34.678 U2.2
  other v1: 55.524,12.446
5V: C8.+ C9.1 D4.2 D5.2 R14.2 R20.1 U1.3 U3.1 U5.1 U5.3 U8.8 | length 60.2
  Top Layer w0.152: v1@57.709,12.192 57.809,12.292 U8.8
  Top Layer w0.381: R14.2 34.036,17.983 37.987,14.033 39.021,14.033 C8.+ 39.624,13.43 39.624,10.414 ; U5.3 39.634,10.424 39.624,10.414 ; D5.2 48.565,30.164 48.912,29.817 48.962,29.817 50.038,28.741 50.038,28.296 50.038,21.435 49.544,20.941 49.544,17.779 R20.1 ; R20.1@49.67,17.755 50.952,16.473 ; v1(53.238,14.122) 53.238,15.494 52.497,16.235 52.497,16.605 D4.2 52.278,16.577 52.174,16.473 50.952,16.473 ; 39.624,10.414 39.624,8.758 39.847,8.534 44.806,8.534 45.872,9.601 47.521,9.601 47.7,9.78 U3.1 47.7,12.343 50.952,15.596 50.952,16.473
  Bottom Layer w0.152: v1(53.238,14.122) 53.594,13.767 55.829,13.767 57.364,12.232 57.618,12.232 v1(57.704,12.146)
AUDIO_IN: R10.2 U4.1 U4.2 | length 4.4
  Top Layer w0.254: R10.2 12.567,27.409 U4.2 U4.1
AUDIO_OUT: R11.1 U4.28 | length 2.8
  Top Layer w0.254: R11.1 24.638,28.847 24.806,28.679 U4.28
DTR: Q1.2 R21.2 U8.28 | length 14.2
  Top Layer w0.152: Q1.2 55.544,28.924 57.64,26.828 57.64,26.803 58.014,26.429 R21.2 58.064,26.429 58.438,26.055 58.438,26.03 58.826,25.642 58.826,19.964 58.752,19.89 ; U8.28 57.809,18.948 58.751,19.89
EN: Q2'.3 R18.2 S1.1 S1.2 U2.3 | length 41.8
  Top Layer w0.152: Q2'.3 52.36,23.027 54.293,21.094 S1.2 56.42,21.019 56.42,20.505 v1(55.982,20.066) ; v1(61.57,20.828) 60.611,20.828 S1.1 60.584,21.333 61.109,21.333 61.595,21.819 R18.2 63.375,24.879 63.476,24.777 65.624,24.777 65.725,24.879 68.923,24.879 73.508,29.464 78.537,29.464 79.52,30.447 U2.3
  Bottom Layer w0.152: v1(55.982,20.066) 57.607,21.692 58.42,21.692 59.188,20.924 59.284,20.828 v1(61.57,20.828)
GND: C1.2 C6.2 C7.2 C8.- C9.2 C10.2 C11.1 C12.- C13.2 C14.2 C15.2 C16.2 C17.- C18.- C19.2 C20.2 C21.2 C22.2 C23.2 C24.2 C25.2 C26.2 C27.2 D4.1 J1.S J2.S P8.2 P9.2 P11.1 R8.2 R9.2 R16.1 R17.2 R27.2 S1.3 S1.4 S2.3 S2.4 U1.1 U2.1 U2.15 U2.38 U2.39 U3.5 U4.4 U4.7 U4.11 U4.12 U4.19 U4.24 U4.25 U5.2 U6.1 U6.2 U6.3 U6.4 U6.7 U7.4 U7.7 U8.3 U8.29 U9.4 | length 2.6
  Top Layer w0.254: U8.3 58.809,15.867 U8.29
  other v1: 42.08,7.481 37.366,7.552 56.582,7.553 21.75,7.631 77.48,7.707 62.477,7.734 12.295,8.088 16.295,8.088 32.295,8.088 70.862,8.085 67.056,9.144 33.11,9.338 21.603,9.414 41.91,9.449 44.172,10.302 13.322,10.353 62.586,10.668 25.221,10.935 27.903,11.048 71.94,11.246 38.163,11.558 42.295,12.088 51.359,12.09 82.26,12.565 54.102,12.802 42.181,13.477 10.465,13.614 28.448,13.665 35.255,13.919 19.609,13.97 63.348,13.97 46.885,14.606 33.68,15.291 13.868,15.443 17.543,15.562 41.291,15.77 62.946,15.774 8.295,16.088 55.263,16.895 33.13,17.532 37.541,17.628 67.615,17.816 21.742,18.288 29.562,18.357 18.39,18.644 48.362,18.847 13.614,19.253 81.029,19.466 42.295,20.088 29.519,20.265 51.732,20.582 36.681,20.733 33.111,21.002 69.291,21.031 57.907,22.611 47.194,22.828 21.946,22.962 13.457,23.018 18.186,23.063 31.648,23.317 60.803,23.729 8.295,24.088 40.295,24.088 44.295,24.088 80.772,24.079 36.692,24.833 62.814,25.936 43.359,26.074 54.357,26.098 51.424,26.105 8.314,26.602 36.435,27.137 67.107,27.534 40.589,27.584 62.648,27.612 55.005,27.786 48.776,27.905 80.754,28.068 18.295,28.088 22.295,28.088 26.295,28.088 30.295,28.088 47.549,29.261 57.132,29.272 40.865,29.356 50.512,29.437 62.762,29.568 67.935,30.187 76.048,30.226 62.989,31.212 8.295,32.088 12.295,32.088 28.295,32.088 36.295,32.088 44.295,32.088 52.317,32.755 55.397,33.412 77.145,33.814 82.042,34.115 13.781,34.234 58.411,34.345 49.16,36.069 26.295,36.088 34.295,36.088 38.295,36.088 42.295,36.088 71.957,36.32 66.328,36.992 61.375,37.166 54.684,37.311 80.822,37.874 8.295,40.088 12.295,40.088 16.295,40.088 28.295,40.088 32.295,40.088 36.295,40.088 40.295,40.088 44.295,40.088 48.295,40.088 52.295,40.088 56.295,40.088 60.295,40.088 64.295,40.088 68.295,40.088 72.295,40.088 76.295,40.088 80.295,40.088 21.993,40.48 10.295,44.088 22.295,44.088 34.295,44.088 38.295,44.088 42.295,44.088 58.295,44.088 62.295,44.088 66.295,44.088 74.295,44.088 78.295,44.088 82.295,44.088 8.295,48.088 16.295,48.088 32.295,48.088 36.295,48.088 40.295,48.088 48.295,48.088 56.295,48.088 60.295,48.088 64.295,48.088 72.295,48.088 76.295,48.088 80.295,48.088 10.295,52.088 14.295,52.088 22.295,52.088 26.295,52.088 34.295,52.088 38.295,52.088 42.295,52.088 50.295,52.088 58.295,52.088 62.295,52.088 66.295,52.088 74.295,52.088 78.295,52.088 82.295,52.088 16.295,56.088 20.295,56.088 24.295,56.088 32.295,56.088 36.295,56.088 40.295,56.088 48.295,56.088 56.295,56.088 60.295,56.088 64.295,56.088 72.295,56.088 76.295,56.088
IN: C3.2 J1.T P9.1 R9.1 | length 28.4
  Top Layer w0.254: R9.1 12.24,47.168 12.801,47.729 C3.2 v1@13.106,49.2 ; P9.1 28.32,44.215 J1.T
  Bottom Layer w0.254: v1(13.106,49.073) 13.106,49.682 15.088,51.664 20.523,51.664 27.653,44.534 28.04,44.534 28.885,43.689 J1.T
IO0: Q1.3 R24.2 S2.1 S2.2 U2.25 | length 31.4
  Top Layer w0.152: Q1.3 52.396,29.18 54.47,31.254 S2.2 S2.1 60.599,27.211 60.216,26.828 60.216,26.803 59.842,26.429 R24.2 59.792,26.429 59.418,26.055 59.418,26.03 59.08,25.692 59.08,20.523 59.69,19.914 61.519,19.914 62.89,18.542 62.89,16.967 64.858,15 U2.25
NetC2_2: C2.2 R3.2 | length 3
  Top Layer w0.381: R3.2 17.932,42.812 18.192,43.072 18.192,43.097 19.175,44.08 19.175,44.618 19.434,44.878 C2.2
NetC3_1: C3.1 R4.1 | length 2.1
  Top Layer w0.254: C3.1 13.36,44.575 R4.1
NetC4_1: C4.1 R5.1 | length 3.6
  Top Layer w0.254: R5.1 8.407,37.478 8.794,37.091 8.794,37.066 9.97,35.89 9.97,35.74 10.357,35.353 C4.1
NetC4_2: C4.2 U9.1 U9.2 | length 4.4
  Top Layer w0.254: C4.2 12.874,38.053 13.081,37.846 U9.2 U9.1
NetC5_1: C5.1 R7.1 | length 3
  Top Layer w0.254: R7.1 21.742,37.986 22.065,38.309 22.065,38.334 22.292,38.561 C5.1
NetC5_2: C5.2 R6.2 R11.2 | length 8
  Top Layer w0.254: R6.2 20.405,32.821 21.027,32.821 21.742,32.106 23.216,32.106 23.931,32.821 24.553,32.821 R11.2 24.511,33.033 C5.2
NetC6_1: C6.1 R5.2 R6.1 R10.1 | length 18.7
  Top Layer w0.254: R5.2 8.382,34.544 10.815,32.111 C6.1 12.453,29.073 R10.1 12.597,29.191 12.597,29.742 12.954,30.099 19.063,30.099 19.972,31.008 19.972,31.033 20.295,31.356 R6.1
NetC7_1: C7.1 R2.2 R7.2 U9.5 | length 10.1
  Top Layer w0.254: R2.2 18.034,34.798 18.495,35.259 19.417,35.259 U9.5 20.587,35.306 21.369,36.088 21.369,36.113 21.692,36.436 R7.2 21.717,35.23 22.479,34.468 C7.1
NetC11_2: C11.2 U5.4 | length 4.4
  Top Layer w0.254: C11.2 34.671,10.249 34.994,10.572 34.994,10.597 35.522,11.125 36.982,11.125 37.591,10.516 38.251,10.516 U5.4
NetC14_1: C14.1 U4.3 | length 3.4
  Top Layer w0.254: C14.1 12.491,25.39 12.877,25.776 12.877,25.801 13.215,26.139 U4.3
NetC15_1: C15.1 U4.9 Y1.2 | length 6.4
  Top Layer w0.254: C15.1 11.113,17.516 11.262,17.665 11.262,17.695 11.685,18.118 Y1.2 14.511,18.118 14.66,18.267 14.66,18.351 14.828,18.519 U4.9
NetC16_1: C16.1 R12.1 U4.26 | length 6
  Top Layer w0.254: U4.26 26.185,26.139 27.483,24.841 R12.1 C16.1
NetC21_1: C21.1 R19.2 | length 1.8
  Top Layer w0.254: C21.1 R19.2
NetC22_1: C22.1 R20.2 | length 1.8
  Top Layer w0.254: C22.1 R20.2
NetC25_1: C25.1 P7.1 R25.2 U4.22 | length 58.9
  Top Layer w0.152: U4.22@25.007,21.059 25.102,21.155 26.266,21.155 26.447,21.336 v1(26.568,21.336) ; C25.1@63.723,10.848 v1(63.723,12.686) ; C25.1 63.779,10.808 64.153,10.434 64.153,10.409 64.956,9.606 65.107,9.606 R25.2
  Bottom Layer w0.152: v1(26.568,21.336) 24.587,21.336 23.571,20.32 23.571,14.478 25.4,12.649 53.442,12.649 54.712,11.379 59.094,11.379 60.401,12.686 v1(63.723,12.686) 65.393,12.686 P7.1
NetD2_1: D2.1 R27.1 | length 1.8
  Top Layer w0.254: D2.1 76.633,37.07 R27.1 R27.1@76.77,37.057
NetD2_2: D2.2 U2.12 | length 9.2
  Top Layer w0.254: U2.12 68.09,33.444 69.037,34.392 74.182,34.392 D2.2@75.096,35.306
NetD3_1: D3.1 R13.1 | length 1.9
  Top Layer w0.254: D3.1 R13.1
NetD5_1: D5.1 R16.2 | length 1.8
  Top Layer w0.305: R16.2 48.49,31.839 D5.1
NetP2_1: P2.1 U2.16 U4.13 | length 65
  Top Layer w0.152: U4.13 16.843,13.439 19.964,16.561 25.959,16.561 26.347,16.949 26.753,16.949 v1(26.772,16.967) ; U2.16@64.59,28.001 64.701,27.889 65.583,27.889 67.869,25.603 v1(68.224,25.603)
  Bottom Layer w0.152: v1(26.772,16.967) 29.058,16.967 30.836,18.745 36.271,18.745 42.723,25.197 67.818,25.197 v1(68.224,25.603) 68.224,23.266 P2.1
NetP3_1: P3.1 U2.13 U4.16 | length 57.9
  Top Layer w0.152: U4.16@24.932,13.467 26.408,13.467 26.657,13.716 v1(26.721,13.716) ; v1(66.876,30.122) U2.13@66.876,31.96
  Bottom Layer w0.152: v1(26.721,13.716) 26.521,13.716 24.994,15.244 24.994,18.694 35.052,28.753 37.033,28.753 38.405,30.124 66.873,30.124 v1(66.876,30.122) 66.876,31.824 P3.1
NetP4_1: P4.1 U2.30 U4.17 | length 53.8
  Top Layer w0.152: U4.17@24.932,14.737 v1(26.77,14.737) ; U2.30@71.844,15.04 v1(71.844,16.878)
  Bottom Layer w0.152: v1(26.77,14.737) 45.623,14.737 46.99,16.104 55.982,16.104 56.998,15.088 70.054,15.088 v1(71.844,16.878) 71.844,15.202 P4.1
NetP5_1: P5.1 U2.10 U4.20 | length 54.7
  Top Layer w0.152: U4.20@24.932,18.547 v1(26.77,18.547) ; v1(70.686,30.122) U2.10@70.686,31.96
  Bottom Layer w0.152: v1(26.77,18.547) 28.859,18.547 30.531,20.218 33.68,20.218 40.234,26.772 67.818,26.772 70.686,29.639 v1(70.686,30.122) 70.686,30.706 P5.1
NetP6_1: P6.1 U2.11 U4.21 | length 52.4
  Top Layer w0.152: U4.21 27.353,19.789 v1(27.381,19.761) ; v1(69.416,30.122) U2.11@69.416,31.96
  Bottom Layer w0.152: v1(27.381,19.761) 28.194,19.761 29.87,21.438 31.598,21.438 38.608,28.448 67.742,28.448 v1(69.416,30.122) 69.416,31.626 P6.1
NetP10_1: P10.1 U2.31 U4.18 | length 55.1
  Top Layer w0.152: U4.18@24.932,16.007 v1(26.77,16.007) ; U2.31@73.114,15.04 v1(73.114,16.878)
  Bottom Layer w0.152: v1(26.77,16.007) 29.926,16.007 30.582,16.662 45.11,16.662 46.33,17.882 56.49,17.882 57.709,16.662 70.002,16.662 71.171,17.831 72.162,17.831 v1(73.114,16.878) 73.101,16.865 P10.1
NetQ1_1: Q1.1 R23.1 | length 2.2
  Top Layer w0.152: Q1.1 54.632,26.924 54.851,26.705 54.851,26.518 54.94,26.429 R23.1
NetQ2'_1: Q2'.1 R21.1 | length 4.7
  Top Layer w0.152: Q2'.1 55.363,23.257 55.982,23.876 57.607,23.876 58.021,24.29 58.021,24.861 R21.1
NetR1_2: R1.2 R4.2 U9.3 | length 11.3
  Top Layer w0.254: R4.2 13.572,41.101 14.068,41.101 15.748,39.421 15.748,37.211 15.113,36.576 ; U9.3 15.113,36.576 ; R1.2 15.748,35.941 15.113,36.576
NetR3_1: R3.1 U9.6 U9.7 | length 5.7
  Top Layer w0.254: R3.1 17.907,38.735 18.644,37.998 19.312,37.998 U9.7 U9.6
NetR13_2: R13.2 U4.5 | length 5.5
  Top Layer w0.254: R13.2 10.84,25.39 11.226,25.003 11.226,24.978 11.567,24.638 13.081,24.638 14.12,23.599 U4.5
NetR25_1: R25.1 U2.26 | length 4.8
  Top Layer w0.152: R25.1 65.481,12.802 66.82,14.14 U2.26
NetR26_1: R26.1 U8.9 | length 2.5
  Top Layer w0.152: U8.9 58.309,12.303 59.055,11.557 R26.1
NetU4_10: U4.10 Y1.1 | length 4.3
  Top Layer w0.254: Y1.1 12.427,15.618 12.85,16.041 12.85,16.383 13.716,17.249 U4.10
OUT: C2.1 J2.T P8.1 R8.1 | length 39.4
  Top Layer w0.254: C2.1 20.41,47.578 20.733,47.255 20.733,47.152 20.882,47.003 R8.1 23.266,47.003 23.406,46.863 51.435,46.863 52.885,45.413 52.885,43.79 52.561,44.113 P8.1
RTS: Q2'.2 R23.2 U8.24 | length 16.7
  Top Layer w0.152: Q2'.2 55.858,25.257 56.236,24.879 R23.2 56.193,24.811 55.647,24.811 55.016,24.181 53.797,24.181 53.188,23.571 53.188,22.911 54.254,21.844 57.074,21.844 v1(57.988,20.93) ; U8.24 59.792,17.754 59.792,18.491 60.249,18.948 v1(60.35,18.948)
  Bottom Layer w0.152: v1(57.988,20.93) 57.988,20.853 58.826,20.015 59.284,20.015 v1(60.35,18.948)
RXD: U2.34 U8.26 | length 22.7
  Top Layer w0.152: v1(58.572,18.694) 58.471,18.694 58.809,18.356 U8.26 U8.26@58.795,17.751 ; U2.34@76.924,15.04 76.962,15.077 v1(76.962,16.815)
  Bottom Layer w0.152: v1(58.572,18.694) 59.233,18.034 61.316,18.034 61.925,18.644 75.125,18.644 76.954,16.815 v1(76.962,16.815)
SCL: P1.1 R28.2 U2.36 U4.14 U6.6 U7.6 | length 85.7
  Top Layer w0.152: v1(25.4,8.534) 27.153,8.534 U6.6 ; U7.6 75.26,9.525 v1(75.286,9.55) ; U2.36@79.464,15.04 v1(79.464,16.878)
  Top Layer w0.254: U4.14 17.25,12.169 17.399,12.02 R28.2 R28.2@17.399,9.633
  Bottom Layer w0.152: P1.1 20.5,12.095 v1(17.325,12.095) 17.369,12.095 20.93,8.534 v1(25.4,8.534) 32.03,8.534 32.087,8.591 32.504,8.591 32.56,8.534 43.332,8.534 44.653,9.855 52.324,9.855 53.591,8.588 71.071,8.588 71.073,8.585 72.085,8.585 73.304,7.366 75.641,7.366 76.2,7.925 76.2,8.636 v1(75.286,9.55) 79.464,13.729 v1(79.464,16.878)
SDA: P1.2 R29.2 U2.33 U4.15 U6.5 U7.5 | length 81.7
  Top Layer w0.152: U4.15@24.936,12.192 26.365,12.192 v1(26.772,11.786) ; v1(25.4,9.5) 24.536,8.636 24.536,8.382 24.994,7.925 U6.5 ; U7.5 v1@75.209,8.255 ; U2.33@75.654,15.04 v1(75.654,16.878)
  Top Layer w0.254: R29.2 20.741,10.086 20.741,10.454 22.456,12.169 U4.15
  Bottom Layer w0.152: P1.2 22.555,11.904 23.178,11.282 23.313,11.282 25.026,9.569 25.331,9.569 v1(25.4,9.5) 26.111,10.211 ; v1(26.772,11.786) 26.772,10.871 26.111,10.211 ; v1(75.654,16.878) 74.473,15.697 74.473,9.042 v1(75.235,8.28) 73.914,8.28 72.39,9.804 54.051,9.804 52.883,10.973 43.891,10.973 43.129,10.211 26.111,10.211
TXD: U2.35 U8.25 | length 23.5
  Top Layer w0.152: U8.25 59.334,17.762 v1(59.334,18.999) ; U2.35 78.283,15.033 v1(78.283,16.866)
  Bottom Layer w0.152: v1(59.334,18.999) 59.295,18.999 59.849,18.445 61.016,18.445 61.57,18.999 76.149,18.999 v1(78.283,16.866)
USB_DM: D4.3 U3.2 U8.5 | length 11.7
  Top Layer w0.152: U3.2 48.35,11.774 v1(51.35,14.774) D4.3 ; v1(55.753,14.808) 56.88,14.808 U8.5
  Bottom Layer w0.152: v1(51.35,14.774) 51.359,14.783 55.728,14.783 v1(55.753,14.808)
USB_DP: D4.4 U3.3 U8.4 | length 11.7
  Top Layer w0.152: U3.3 49.124,11.024 49.124,11.989 50.648,13.513 54.204,13.513 54.648,13.957 ; D4.4 54.417,14.555 54.417,14.188 54.648,13.957 ; U8.4 55.397,15.367 55.093,15.062 55.093,14.402 54.648,13.957
VBIAS: C18.+ R1.1 R2.1 R15.1 R17.1 | length 35.7
  Top Layer w0.254: R1.1 15.807,31.297 16.455,31.297 v1(16.866,30.886) 17.327,31.348 18.026,31.348 R2.1 ; R15.1 R17.1 37.643,28.194 39.065,29.616 C18.+@39.065,31.491 ; v1(37.58,30.818) 38.392,30.818 C18.+@39.065,31.491 ; C18.+ C18.+@39.065,31.491
  Bottom Layer w0.305: v1(16.866,30.886) 37.541,30.886 v1@37.643,30.785
VREF: C1.1 C17.+ R14.1 R15.2 U9.8 | length 32.1
  Top Layer w0.305: C1.1 20.066,40.386 19.464,39.784 U9.8 21.641,39.116 22.2,39.675 26.873,39.675 31.699,34.849 C17.+ 32.785,31.63 34.036,30.378 R14.1 34.061,23.635 34.384,23.312 34.384,23.287 35.263,22.408 35.491,22.408 R15.2
pads on no net: J1.R J1.RN J1.SN J1.TN J2.R J2.RN J2.SN J2.TN U2.4 U2.5 U2.6 U2.7 U2.8 U2.9 U2.14 U2.17 U2.18 U2.19 U2.20 U2.21 U2.22 U2.23 U2.24 U2.27 U2.28 U2.29 U2.32 U2.37 U3.4 U3.S1 U3.S2 U3.S3 U3.S4 U3.S5 U3.S6 U4.27 U8.1 U8.2 U8.10 U8.11 U8.12 U8.13 U8.14 U8.15 U8.16 U8.17 U8.18 U8.19 U8.20 U8.21 U8.22 U8.23 U8.27

## Polygon pours and split planes (outlines as drawn)
GND on Bottom Layer "GND_L04_P001" (solid, pour order 1): 6.75,10 6.75,57 cw(c10,57) 10,60.25 80,60.25 cw(c80,57) 83.25,57 83.25,10 cw(c80,10) 80,6.75 10,6.75 cw(c10,10)
GND on Middle Layer 1 "GND_L02_P002" (solid, pour order 2): 6.75,10 6.75,57 cw(c10,57) 10,60.25 80,60.25 cw(c80,57) 83.25,57 83.25,10 cw(c80,10) 80,6.75 10,6.75 cw(c10,10)
GND on Middle Layer 2 "GND_L03_P004" (solid, pour order 4): 6.75,10 6.75,57 cw(c10,57) 10,60.25 80,60.25 cw(c80,57) 83.25,57 83.25,10 cw(c80,10) 80,6.75 10,6.75 cw(c10,10)
3V3_D on Middle Layer 2 "3V3_D_L03_P000" (solid, pour order 0): 45.009,6.75 45.009,38.557 83.25,38.557 83.25,10 cw(c80,10) 80,6.75
3V3_A on Middle Layer 2 "3V3_A_L03_P003" (solid, pour order 3): 9.5,9.195 9.5,24.79 39.624,24.79 39.624,9.195
GND on Top Layer "GND_L01_P005" (solid, pour order 5): 6.75,10 6.75,57 cw(c10,57) 10,60.25 80,60.25 cw(c80,57) 83.25,57 83.25,10 cw(c80,10) 80,6.75 10,6.75 cw(c10,10)

## Silkscreen, mask and mechanical layers (free items; w line width, h text height)
Top Overlay:
  text "INPUT" at 26.365,59.334 h1 r180
  text "OUTPUT" at 77.419,59.284 h1 r180
  text "+" at 49.897,45.367 h1 r90
  text "+" at 26.012,45.278 h1 r90
  text "IN" at 23.772,42.421 h1 r90
  text "OUT" at 49.832,38.103 h1 r90
  text "BTN0" at 62.583,30.483 h1 r90
  text "RST" at 62.278,20.577 h1 r90
Bottom Overlay:
  text "INPUT" at 34.75,58.875 h1 r180
  text "OUTPUT" at 58.169,58.773 h1 r180
  text "GND" at 76.553,35.608 h1 r90
  text "S0" at 67.409,34.745 h1 r90
  text "PO" at 72.286,34.694 h1 r90
  text "P1" at 69.695,34.44 h1 r90
  text "T0" at 68.577,21.994 h1 r90
  text "Multi-effect V1.0" at 8.941,21.387 h1.52 r270
  text "SCL" at 20.978,16.558 h1 r90
  text "SDA" at 23.01,16.558 h1 r90
  text "P2" at 65.936,15.491 h1 r90
  text "S2" at 73.505,12.85 h1 r90
  text "S1" at 71.168,12.799 h1 r90
Board Outline:
  the board outline again, w0.254

## Text inside footprints (layer, text, board x,y; h text height)
U2: Mechanical 13 "ANTENNA" at 85.8,29.5 h1.78 r270
U3: Mechanical 13 "PCB EDGE" at 53.416,6.845 h1
U7: Top Overlay "*" at 67.92,12.548 h1; Mechanical 13 "*" at 67.92,12.548 h1
U9: Top Overlay "*" at 13.081,39.624 h1; Mechanical 13 "*" at 13.081,39.624 h1